# Altium PCB 701C USB Hub.PcbDoc (part 2 of 3)
Units mil, origin at the board's own origin, x right, y up, seen from the top; angles counter-clockwise.
Board outline 4055.12 x 2244.09 mil, 4 copper layers (Component Side, Ground Plane, Power Plane, Solder Side), stack 61 mil thick; 153 components, 125 nets, 650 pads, 241 vias.
Unrouted connection lines stored in the file: 208.
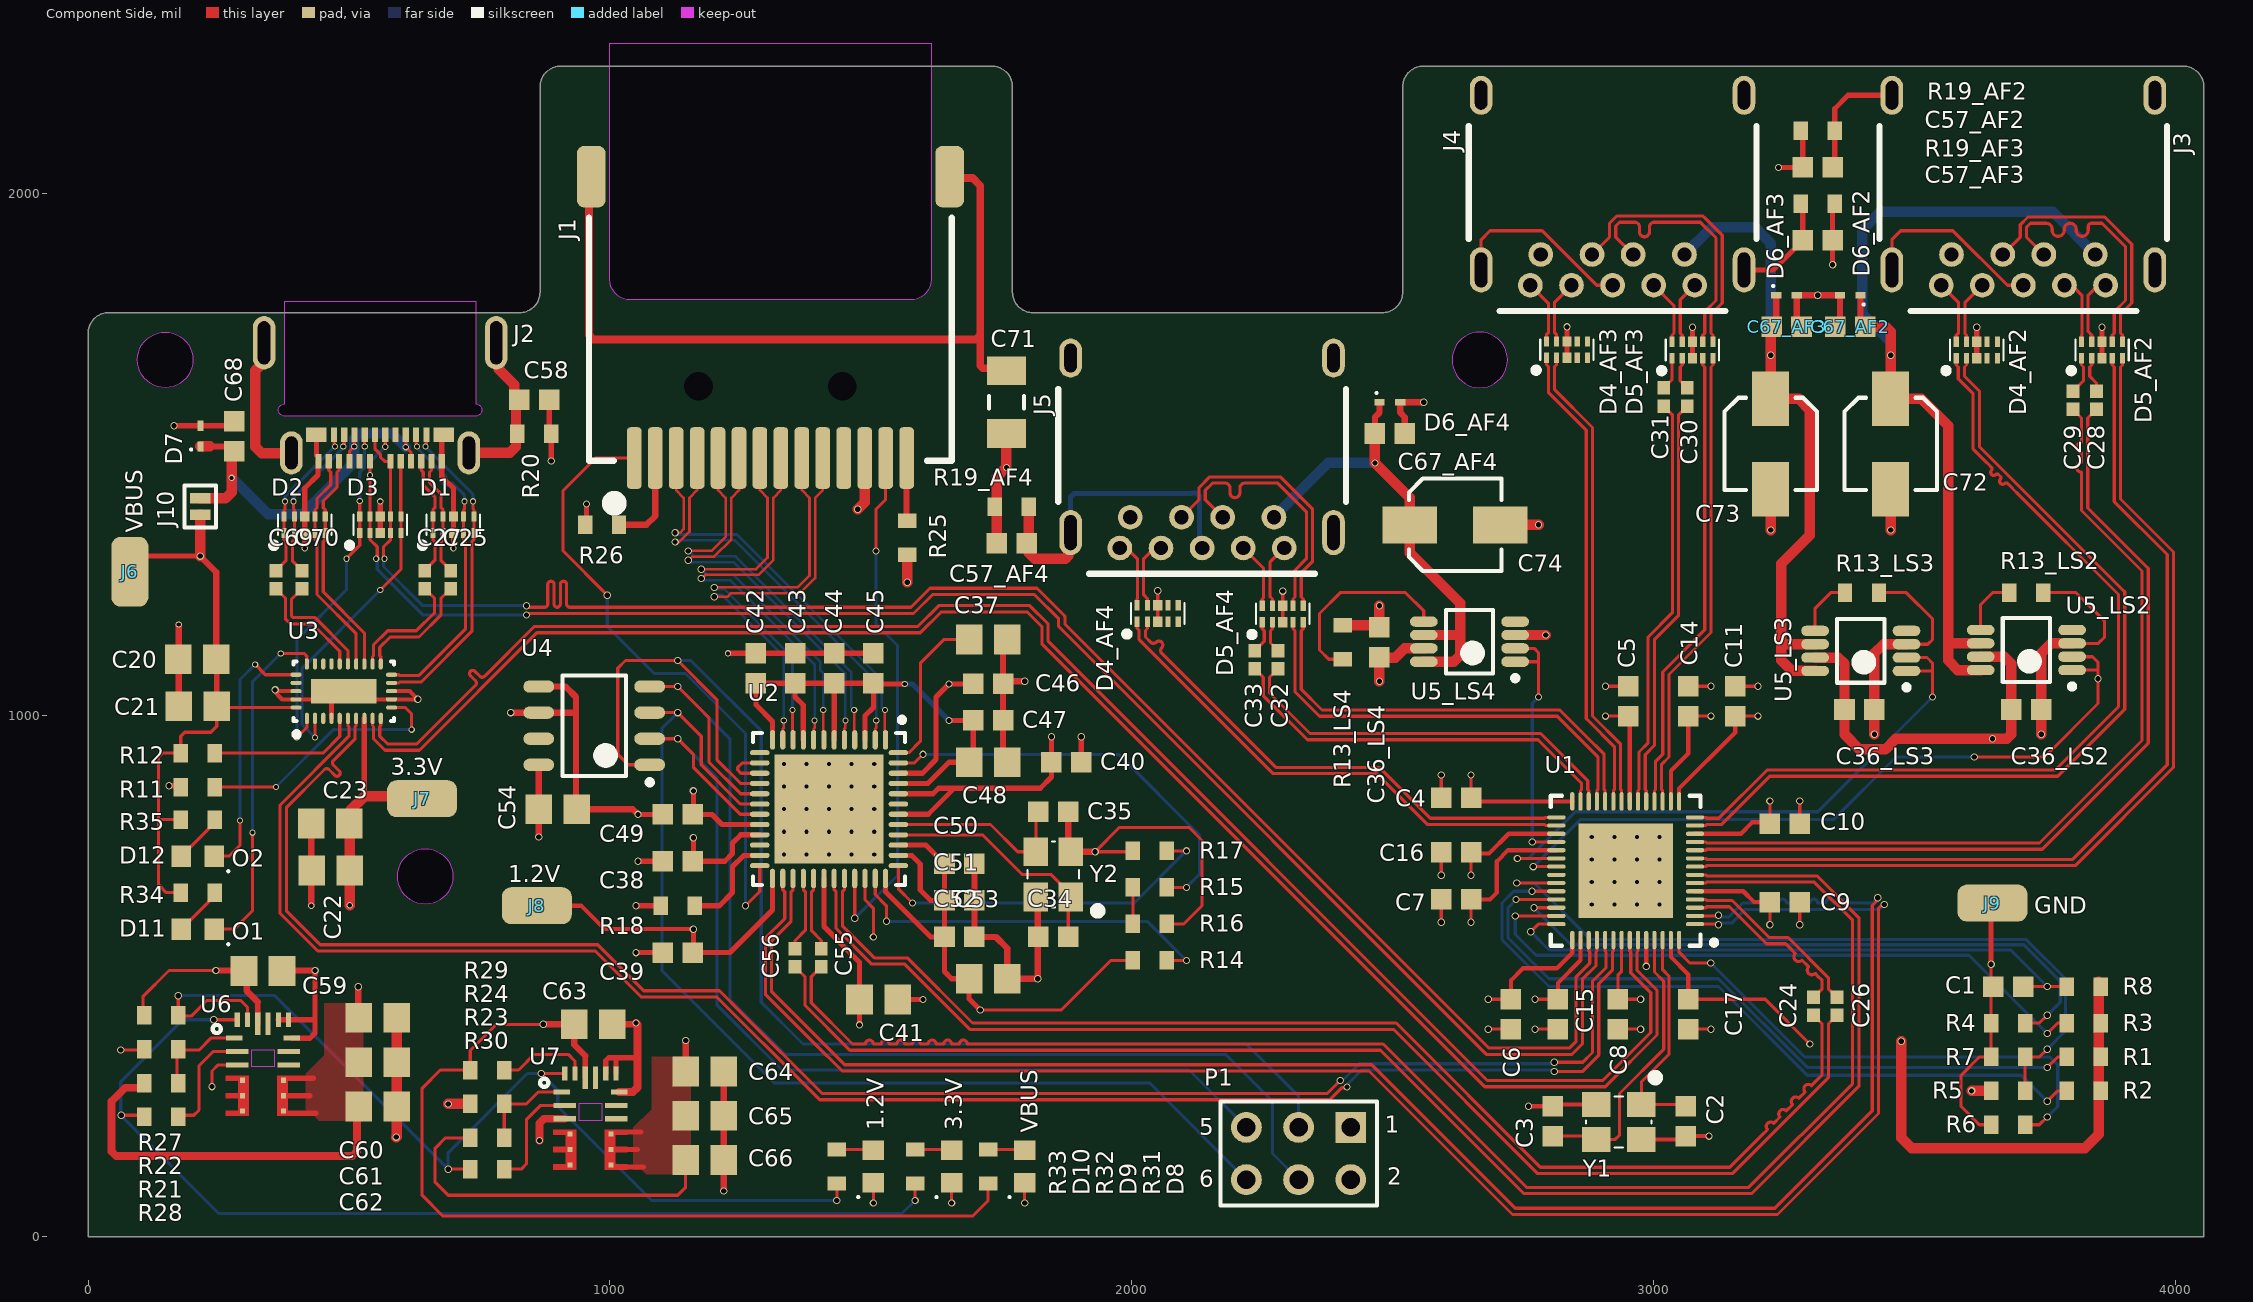
[diagram p0: Component Side view]

## Via types
v1: diameter 14, hole 10, Component Side to Solder Side, 157 vias
v2: diameter 12, hole 8, Component Side to Solder Side, 43 vias
v3: diameter 19.68, hole 7.87, Component Side to Solder Side, 41 vias

## Nets (pads, with @x,y where several pads share a name; then routed paths per layer and width w, separated by ;. In a path a pad name is that pad's centre, name@x,y a point inside that pad or via, vN(x,y) a via of type N, cw(c..) or ccw(c..) an arc to the next point about the centre after c; other vN are vias at no path point) (continued)
DFP4_TXa_N: (continued)
  Component Side w6: C33.1@2235.79,1089.13 2252.29,1072.63 2252.29,1037.71 2337,953 2778.97,953 2862.23,869.74 2862.23,857.43 2860.35,855.56 U1.27@2860.35,834.84
DFP4_TXa_P: C32.1 U1.26 | length 773.4
  Component Side w6: C32.1@2280.79,1089.13 2264.29,1072.63 2264.29,1042.68 2341.97,965 2783.94,965 2874.23,874.71 2874.23,857.43 2876.1,855.56 U1.26@2876.1,834.84
DFP4_TXb_N: C33.2 D5_AF4.1 J5.8 | length 191.8
  Component Side w6: J5.8@2213.78,1320.51 2253,1281.29 2253,1225.53 2250.31,1222.84 D5_AF4.1@2250.31,1210 ; C33.2@2235.79,1123.77 2254.16,1142.14 2254.16,1161.82 2250.31,1165.66 D5_AF4.1@2250.31,1178.5
DFP4_TXb_P: C32.2 D5_AF4.2 J5.9 | length 186.4
  Component Side w6: D5_AF4.2@2270,1178.5 2270,1165.66 2266.16,1161.82 2266.16,1138.4 C32.2@2280.79,1123.77 ; D5_AF4.2@2270,1210 2270,1222.84 2265,1227.84 2265,1292.99 J5.9@2292.52,1320.51
"DFP PCTL2": U1.35 U5_LS2.1 U5_LS2.2 | length 1439.5
  Component Side w6: v1(2769.84,709.84) U1.35@2814.09,709.84 ; v1(3615,920) 3750,920 3852.4,1022.4 v1(3852.4,1070) 3852.4,1086.61 ; U5_LS2.1@3802.6,1086.61 3852.4,1086.61 ; U5_LS2.2@3802.6,1112.2 3841.81,1112.2 3852.4,1101.61 3852.4,1086.61
  Solder Side w6: v1(2769.84,709.84) 2860,800 3345,800 3465,920 v1(3615,920)
"DFP PCTL3": U1.34 U5_LS3.1 U5_LS3.2 | length 1167.4
  Component Side w6: v1(2739.41,725.59) U1.34@2814.09,725.59 ; U5_LS3.1@3485.2,1085 3535,1085 ; U5_LS3.2@3485.2,1110.59 3524.41,1110.59 3535,1100 3535,1085 ; v1(3535,1035) 3535,1085
  Solder Side w6: v1(2739.41,725.59) 2760.59,725.59 2850,815 3315,815 v1(3535,1035)
"DFP PCTL4": U1.32 U5_LS4.1 U5_LS4.2 | length 507.2
  Component Side w6: U5_LS4.1@2735.16,1102.61 2780,1102.61 ; U5_LS4.2@2735.16,1128.2 2771.8,1128.2 2780,1120 2780,1102.61 ; v1(2767.91,757.09) U1.32@2814.09,757.09 ; v1(2780,1035) 2780,1102.61
  Solder Side w6: v1(2767.91,757.09) 2767.91,1022.91 v1(2780,1035)
"DUPLEX LED3": J1.13 U2.33 | length 1017.3
  Component Side w6: v1(1469.21,610.79) U2.33@1469.21,687.13 ; v1(1510,1315) 1510,1395 1528.54,1413.54 J1.13@1528.54,1492.96
  Solder Side w6: v1(1469.21,610.79) 1551.33,692.9 1551.33,1133.67 1510,1175 v1(1510,1315)
EPR_CLK: P1.5 U2.19 U4.2 | length 1938.9
  Component Side w6: U4.2@1076.3,955 v1(1130,955) 1160,925 1160,900 1249.84,810.16 U2.19@1287.13,810.16
  Solder Side w6: v1(1130,955) 1205,880 1205,445 1330,320 2110,320 P1.5@2220,210
EPR_CS: P1.3 U2.16 U4.1 | length 2578.4
  Component Side w6: U4.1@1076.3,905 1035,905 1015,925 1015,1090 1030,1105 v1(1130,1105) 1205,1030 1205,915 1250.79,869.21 U2.16@1287.13,869.21
  Solder Side w6: v1(1130,1105) 1155,1105 1290,970 1290,450 1370,370 2220,370 2320,270 P1.3@2320,210
EPR_DI: P1.6 U2.18 U4.3 | length 2108.7
  Component Side w6: U4.3@1076.3,1005 v1(1130,1005) 1175,960 1175,905 1250.16,829.84 U2.18@1287.13,829.84
  Solder Side w6: v1(1130,1005) 1100,975 1100,510 1315,295 2035,295 P1.6@2220,110
EPR_DO: P1.4 U2.17 U4.4 | length 2278.6
  Component Side w6: U4.4@1076.3,1055 v1(1130,1055) 1190,995 1190,910 1250.47,849.53 U2.17@1287.13,849.53
  Solder Side w6: v1(1130,1055) 1230,955 1230,455 1335,350 2180,350 2270,260 2270,160 P1.4@2320,110